# Altium PCB ESC_BOARD.PcbDoc (part 1 of 3)
Units mm, origin at the board's own origin, x right, y up, seen from the top; angles counter-clockwise.
Board outline 80 x 50 mm, 2 copper layers (Top Layer, Bottom Layer); 102 components, 86 nets, 400 pads, 339 vias.
Unrouted connection lines stored in the file: 55.
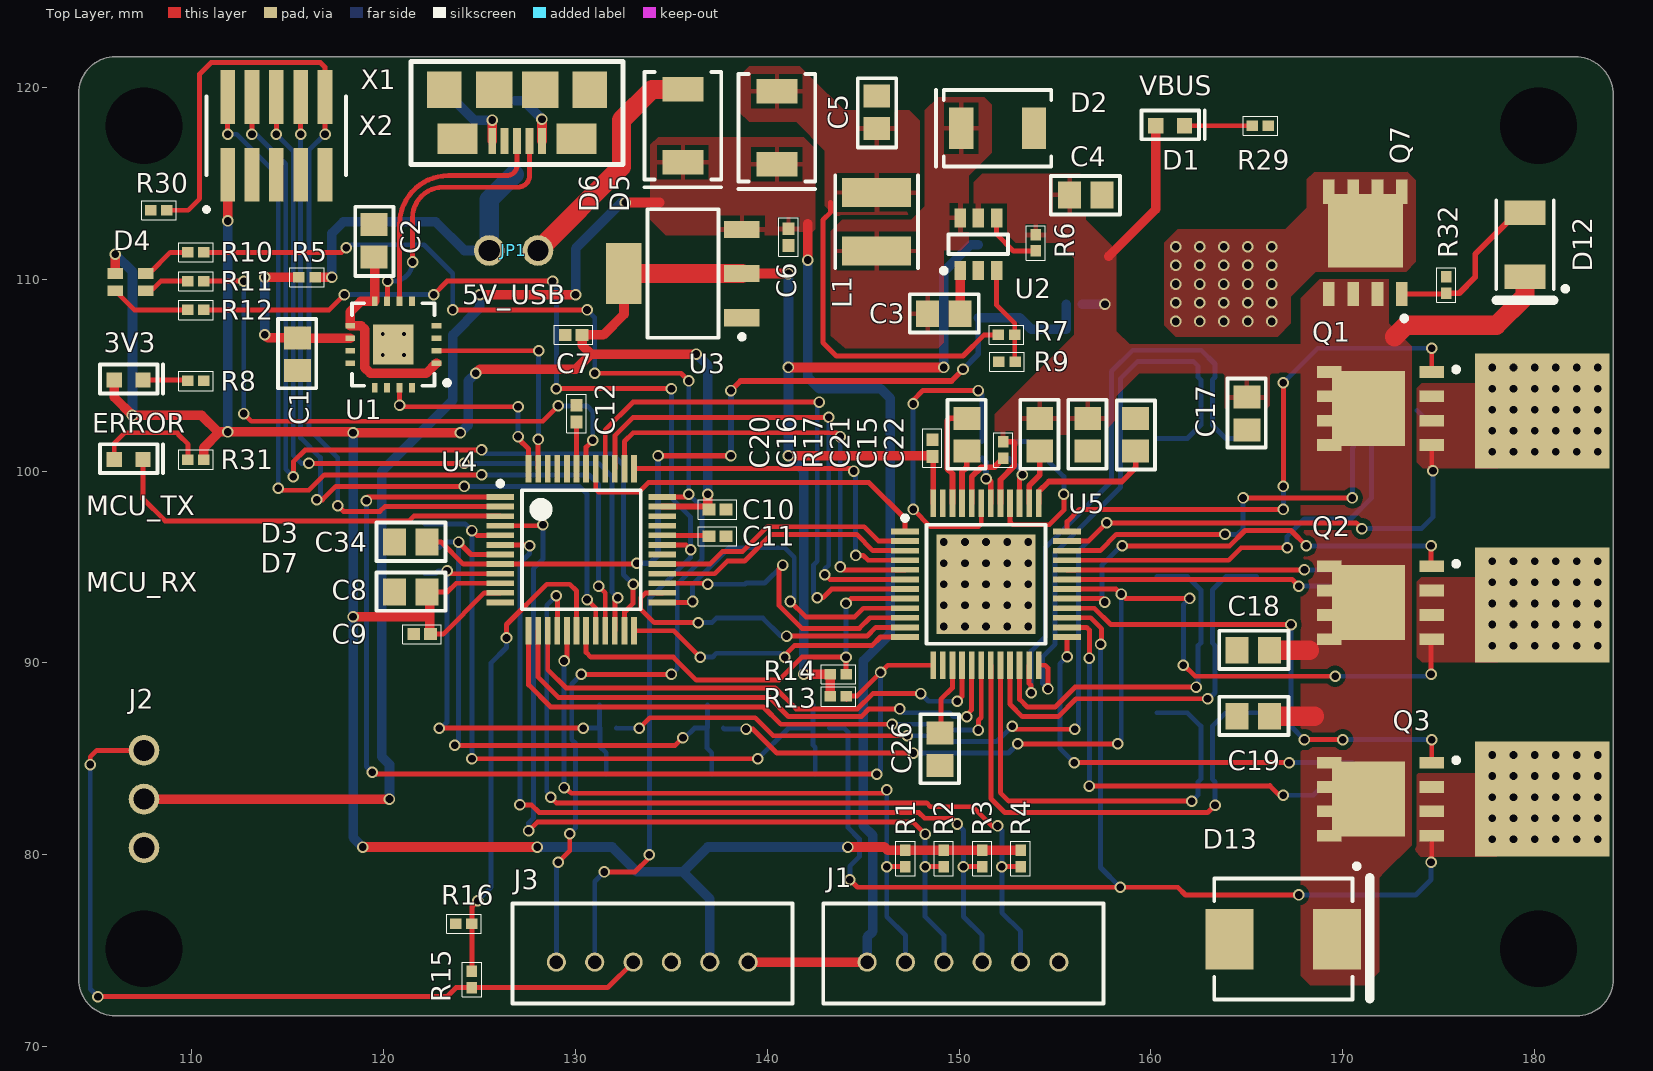
[diagram p0: Top Layer view]
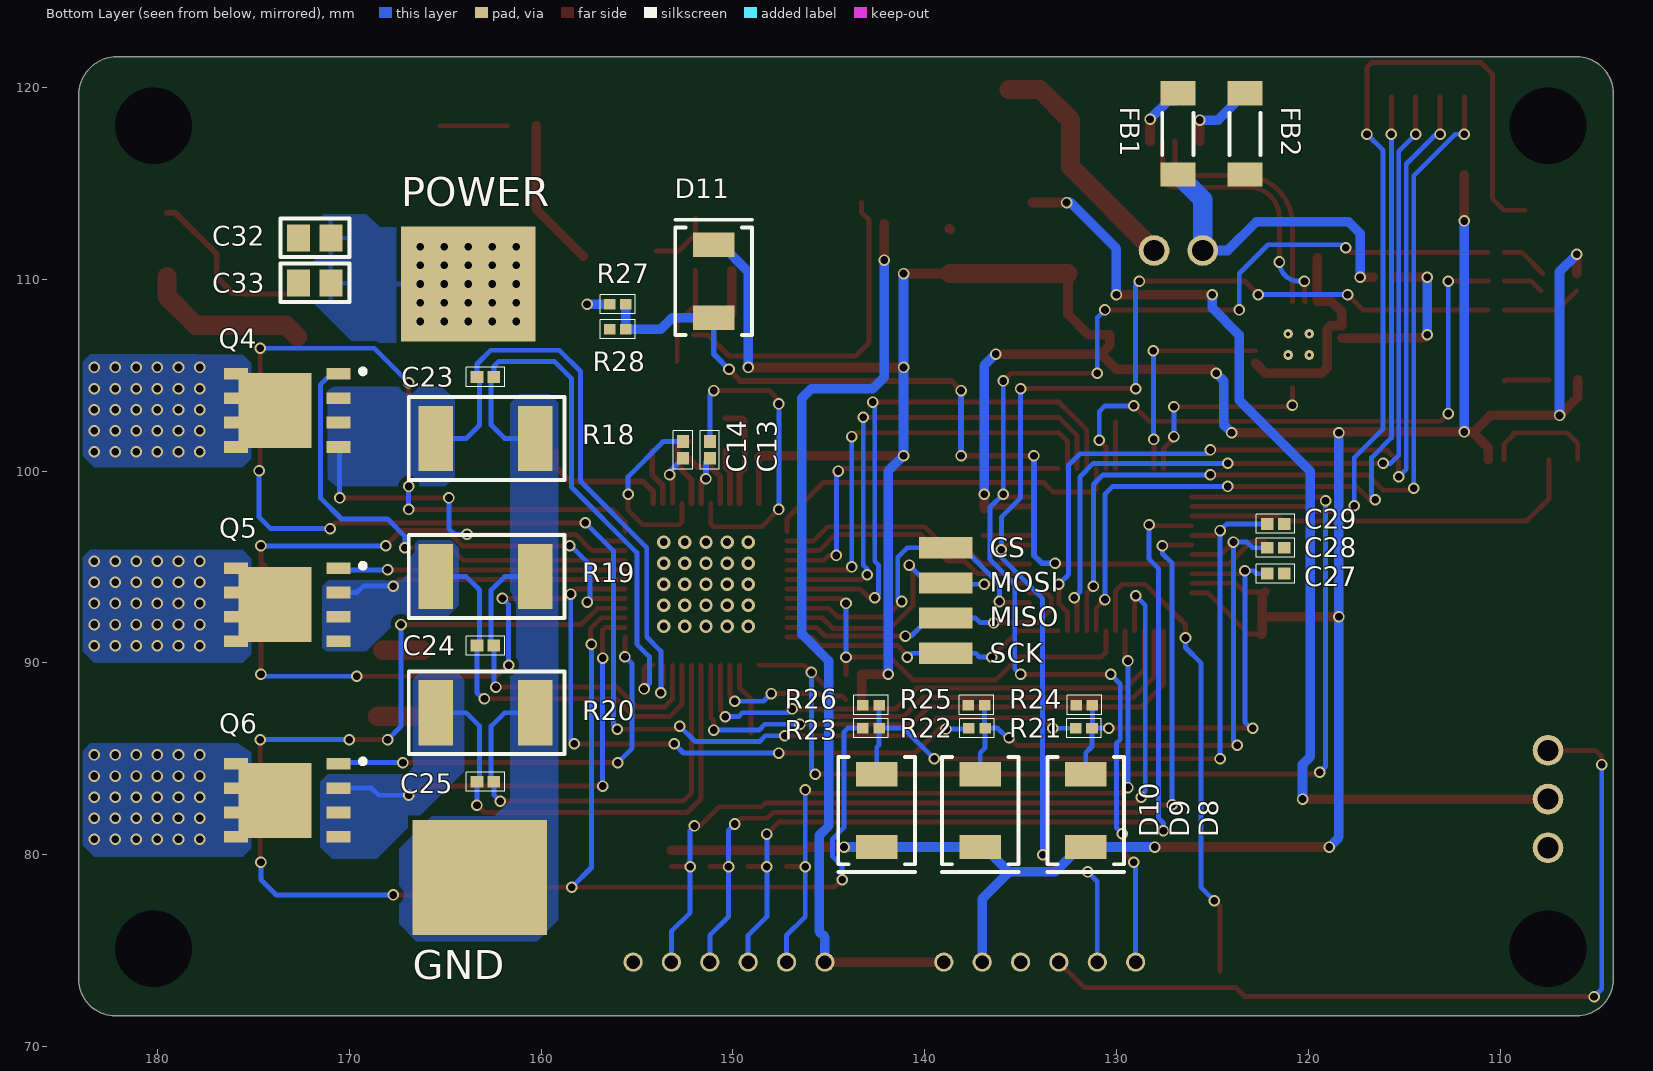
[diagram p1: Bottom Layer view, seen from below]
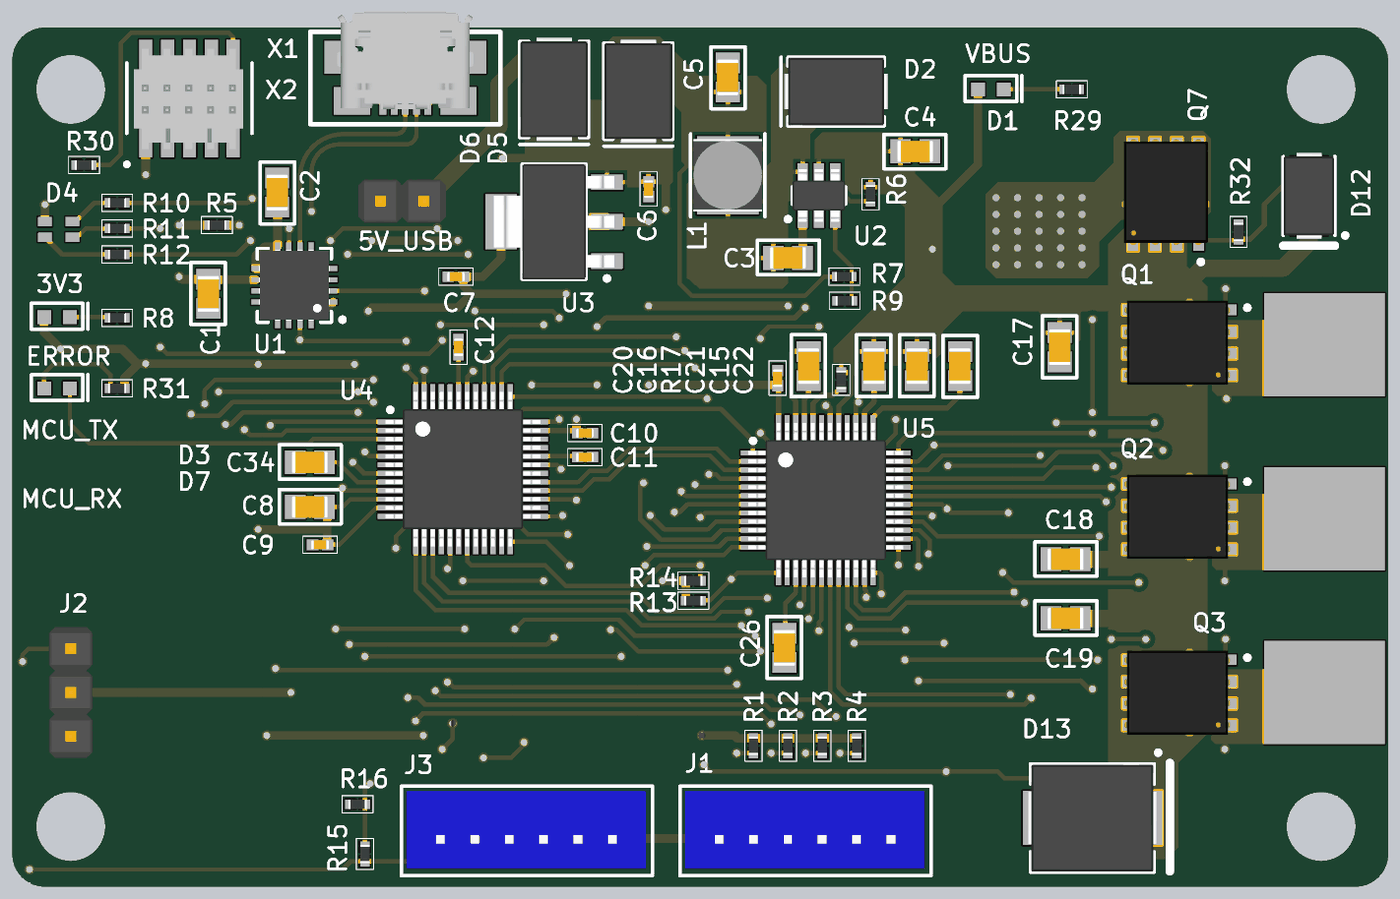
[diagram p3: 3D render of the assembled board from above, using the file's embedded part models]
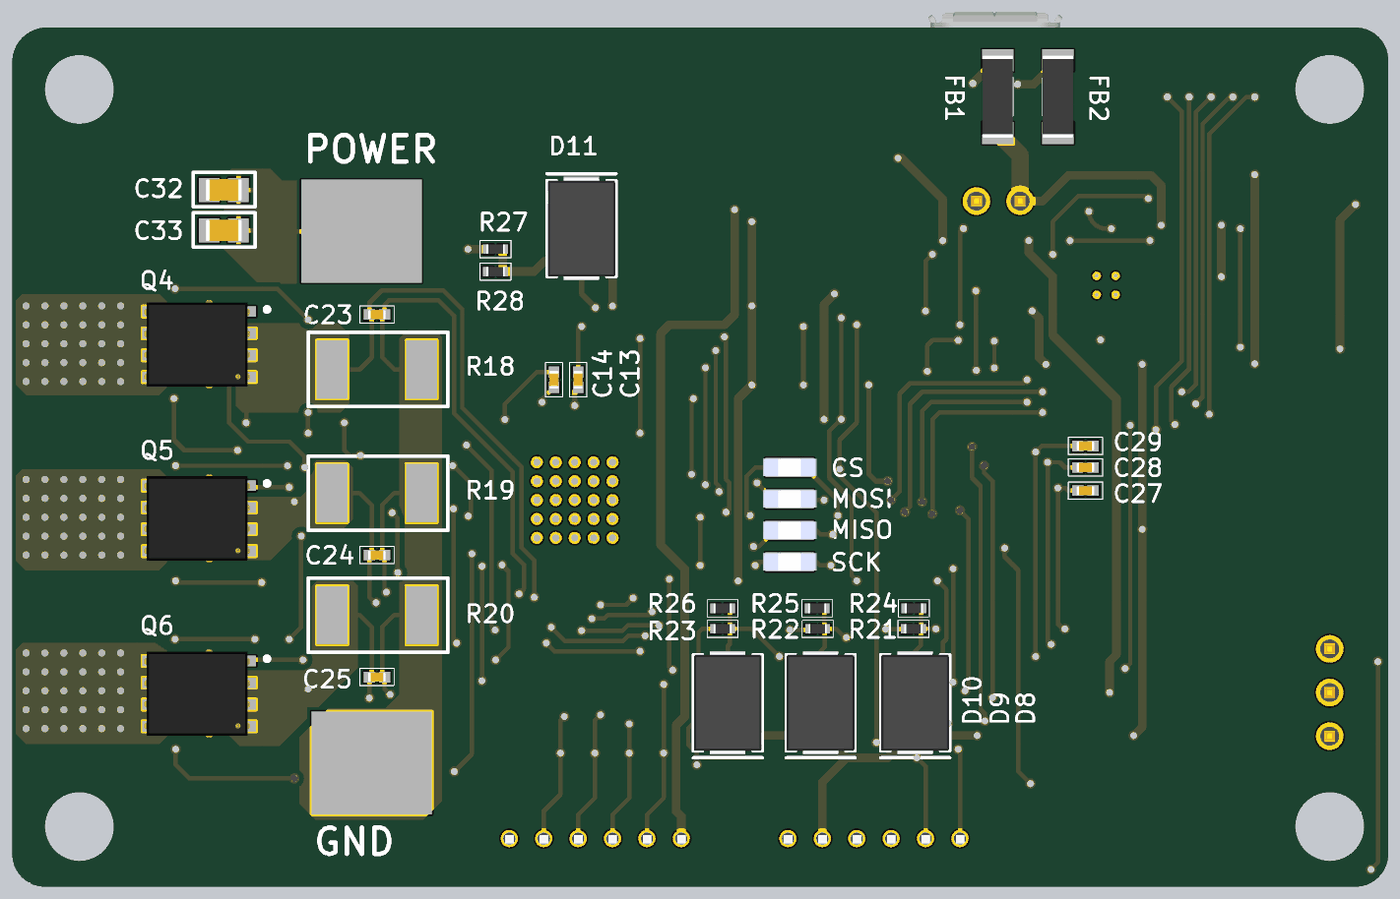
[diagram p4: 3D render of the assembled board from below, using the file's embedded part models]

## Layer stack, top to bottom
Top Solder: solder mask 0.0102, Solder Resist, Dk 3.5
Top Layer: signal copper 0.0356
Dielectric 1: dielectric 0.32, FR-4, Dk 4.8
Bottom Layer: signal copper 0.0356
Bottom Solder: solder mask 0.0102, Solder Resist, Dk 3.5

## Board outline
106,121.6 ccw(c106,119.7) 104.1,119.7 104.1,73.5 ccw(c106,73.5) 106,71.6 182.2,71.6 ccw(c182.2,73.5) 184.1,73.5 184.1,119.6 ccw(c182.1,119.6) 182.1,121.6

## Design rules (kind name [scope] priority, off if disabled: settings)
Clearance [All] p1: gap=0.254 ignorepadtopadclearanceinfootprint=FALSE except(0: Arc-Hole Track-Hole SMDPad-Hole THPad-Hole Via-Hole Fill-Hole Poly-Hole Region-Hole Text-Hole; 0.1: Arc-Arc Arc-Track Arc-SMDPad Arc-Via Track-Track Track-SMDPad Track-Via SMDPad-SMDPad)
PlaneConnect [InNet('+VBUS')] p1: planeconnectstyle=Relief reliefexpansion=0.508 reliefentries=4 reliefconductorwidth=0.254 reliefairgap=0.254
PolygonConnect "VBUS CAPS" [InComponent('C17') Or InComponent('C18') Or InComponent('C19') Or InComponent('R17') Or InComponent('C21') Or InComponent('C15') Or  InComponent('R6') Or  InComponent('U2') Or InComponent('C4')] p1: connectstyle=Relief reliefconductorwidth=0.254 reliefentries=4 polygonreliefangle="90 Angle" airgapwidth=0.254
PolygonConnect PolygonConnect_1 [All vs IsNamedPolygon('POWER_GND') Or IsNamedPolygon('V_IN')] p2: connectstyle=Direct reliefconductorwidth=0.254 reliefentries=4 polygonreliefangle="90 Angle" airgapwidth=0.254
PolygonConnect "FET DIRECT CONNECT" [InNet('+VBUS') Or InNet('SH_A') Or InNet('SH_B') Or InNet('SH_C') Or InNet('SL_C') Or InNet('SL_A') Or InNet('SL_B')] p3: connectstyle=Direct reliefconductorwidth=0.254 reliefentries=4 polygonreliefangle="90 Angle" airgapwidth=0.254
PolygonConnect [All] p4: connectstyle=Relief reliefconductorwidth=0.254 reliefentries=4 polygonreliefangle="90 Angle" airgapwidth=0.254
RoutingVias [All] p1: holewidth=0.711 width=1.27 viastyle="Through Hole" minholewidth=0.4 minwidth=0.5 maxholewidth=0.711 maxwidth=2
SolderMaskExpansion [All] p1: expansion=0.102
Width [All] p1: maxlimit=2 minlimit=0.254 preferedwidth=0.254
29 further rules are at their usual default settings.

## Classes and differential pairs
net class UART: UART_MCU_RX UART_MCU_TX
net class SPI: SPI_CS_N SPI_MISO SPI_MOSI SPI_SCK
net class PWM_GATE_DRIVES: A_HS A_LS B_HS B_LS C_HS
net class JTAG: nRESET TCK TDI TDO TMS
component class "C2000 Piccolo": C8 C9 C10 C11 C12 CS D7 MISO MOSI R13 R14 R15 R16 R30 R31 SCK U4 X2
component class DRV8305: C13 C14 C15 C16 C17 C18 C19 C20 C21 C22 C23 C24 C25 C26 C27 C28 C29 C32 C33 C34 D8 D9 D10 D11 D12 D13 Q1 Q2 Q3 Q4 Q5 Q6 Q7 R17 R18 R19 R20 R21 R22 R23 R24 R25 R26 R27 R28 R32 U5
component class POWER: C3 C4 C5 C6 C7 D1 D2 D3 D4 D5 D6 JP1 L1 R6 R7 R8 R9 R10 R11 R12 R29 U2 U3
component class TOP: J1 J2 J3 R1 R2 R3 R4
component class USB: C1 C2 FB1 FB2 R5 U1 X1

## Components (designator, comment, footprint, x,y, rotation, side; value= is the part's Value field where it differs from the comment)
C1 "10uF" C0805 115.5,106.1 r90 top
C2 "10uF" C0805 119.5,112 r270 top
C3 "100nF" C0805 149.2,108.2 r0 top
C4 "4u7" C0805 156.6,114.4 r180 top
C5 "10uF" C0805 145.7,118.7 r270 top
C6 "100nF" C0402 141.1,112.2 r90 top
C7 "100nF" C0402 129.9,107.1 r0 top
C8 "10uF" C0805 121.4,93.7 r0 top
C9 "2u2" C0402 122,91.5 r0 top
C10 "100nF" C0402 137.4,98 r180 top
C11 "2u2" C0402 137.4,96.6 r0 top
C12 "2u2" C0402 130.05,103 r90 top
C13 "47nF" C0402 151.2,101.1 r270 bottom
C14 "47nF" C0402 152.6,101.1 r270 bottom
C15 "4u7" C0805 156.7,101.9 r90 top
C16 "1uF" C0805 150.4,101.9 r90 top
C17 "1uF" C0805 165,103 r90 top
C18 "1uF" C0805 165.34,90.66 r0 top
C19 "1uF" C0805 165.34,87.22 r0 top
C20 "100nF" C0402 148.6,101.2 r270 top
C21 "2u2" C0805 154.2,101.9 r90 top
C22 "1uF" C0805 159.2,101.9 r270 top
C23 "1nF" C0402 162.9,104.9 r0 bottom
C24 "1nF" C0402 162.9,90.9 r0 bottom
C25 "1nF" C0402 162.9,83.8 r0 bottom
C26 "1uF" C0805 149,85.5 r90 top
C27 "100nF" C0402 121.7,94.65 r0 bottom
C28 "100nF" C0402 121.7,96 r0 bottom
C29 "100nF" C0402 121.7,97.25 r0 bottom
C32 "1uF" C0805 171.8,112.15 r180 bottom
C33 "100nF" C0805 171.8,109.8 r180 bottom
C34 "100nF" C0805 121.4,96.3 r0 top
CS "5015" TP_HOOK 138.9,96 r180 bottom (schematic designator TP1)
D1 "Green" LED_0603 161,118 r0 top
D2 "SS110-TP" DO-214AA_Diode 152,117.873 r180 top
D3 "Green" LED_0603 106.7,104.75 r0 top
D4 "EAST1616RGBB4" LED_TRICOLOR 107.778,109.538 r0 top
D5 "SS110-TP" DO-214AA_Diode 140.5,117.9 r270 top
D6 "SS110-TP" DO-214AA_Diode 135.6,118 r270 top
D7 "Red" LED_0603 106.7,100.6 r0 top
D8 "SS110-TP" DO-214AA_Diode 131.6,82.3 r270 bottom
D9 "SS110-TP" DO-214AA_Diode 137.1,82.3 r270 bottom
D10 "SS110-TP" DO-214AA_Diode 142.5,82.3 r270 bottom
D11 "SS110-TP" DO-214AA_Diode 151,109.9 r90 bottom
D12 "10V" DO-214AC 179.5,111.8 r270 top
D13 "51V" DO-214AB 166.9,75.6 r0 top
FB1 "23R @ 100 MHz" FB_1806 126.8,117.58 r270 bottom
FB2 "23R @ 100 MHz" FB_1806 123.3,117.58 r270 bottom
J1 "B6B-PH-K-S(LF)(SN)" JST-PH-6 145.2,74.4 r0 top
J2 "732-5316-ND" 3PIN_HEADER 107.5,82.9 r270 top
J3 "B6B-PH-K-S(LF)(SN)" JST-PH-6 129,74.4 r0 top
JP1 "952-2262-ND" 2PIN_HEADER 125.5,111.5 r0 top
L1 "22uH" INDUCTOR 145.7,113 r90 top
MISO "5015" TP_HOOK 138.9,90.5 r180 bottom (schematic designator TP2)
MOSI "5015" TP_HOOK 138.9,94.167 r180 bottom (schematic designator TP3)
Q1 "SIR186DP-T1-RE3" "SO-8 PowerPAK" 171.719,103.392 r180 top
Q2 "SIR186DP-T1-RE3" "SO-8 PowerPAK" 171.719,93.262 r180 top
Q3 "SIR186DP-T1-RE3" "SO-8 PowerPAK" 171.719,83.022 r180 top
Q4 "SIR186DP-T1-RE3" "SO-8 PowerPAK" 173.481,103.292 r0 bottom
Q5 "SIR186DP-T1-RE3" "SO-8 PowerPAK" 173.481,93.162 r0 bottom
Q6 "SIR186DP-T1-RE3" "SO-8 PowerPAK" 173.481,82.962 r0 bottom
Q7 "FDWS9509L-F085" "SO-8 PowerPAK" 171.3,112.15 r90 top
R1 "10k" R0402 147.2,79.8 r90 top
R2 "10k" R0402 149.2,79.8 r90 top
R3 "10k" R0402 151.2,79.8 r90 top
R4 "10k" R0402 153.2,79.8 r90 top
R5 "0R" R0402 116,110.1 r180 top
R6 "10k" R0402 154,111.9 r90 top
R7 "54k9" R0402 152.475,107.1 r180 top
R8 "100R" R0402 110.2,104.7 r0 top
R9 "10k" R0402 152.5,105.7 r0 top
R10 "100R" R0402 110.2,111.4 r0 top
R11 "100R" R0402 110.2,109.9 r0 top
R12 "100R" R0402 110.2,108.4 r0 top
R13 "10k" R0402 143.7,88.25 r180 top
R14 "10k" R0402 143.7,89.4 r180 top
R15 "0R" R0402 124.6,73.5 r270 top
R16 "10k" R0402 124.175,76.4 r0 top
R17 "100R" R0402 152.3,101.1 r90 top
R18 "0R002" R2512 162.96,101.7 r0 bottom
R19 "0R002" R2512 162.96,94.5 r0 bottom
R20 "0R002" R2512 162.96,87.4 r0 bottom
R21 "34K8" R0402 131.7,86.6 r0 bottom
R22 "34K8" R0402 137.275,86.6 r0 bottom
R23 "34K8" R0402 142.8,86.6 r0 bottom
R24 "4K99" R0402 131.675,87.8 r180 bottom
R25 "4K99" R0402 137.3,87.8 r180 bottom
R26 "4K99" R0402 142.8,87.8 r180 bottom
R27 "34K8" R0402 156,108.7 r0 bottom
R28 "4K99" R0402 156,107.4 r180 bottom
R29 "2k2" R0402 165.7,118 r0 top
R30 "2k2" R0402 108.275,113.6 r0 top
R31 "2k2" R0402 110.2,100.6 r0 top
R32 "54k9" R0402 175.4,109.7 r270 top
SCK "5015" TP_HOOK 138.9,92.333 r180 bottom (schematic designator TP4)
U1 "FT230XQ-R" QFN_EP-16 120.5,106.6 r180 top
U2 "LMR16006XDDCR" SOT23-6_Lead 151,111.825 r90 top
U3 "AZ1117EH-3.3TRG1" SOT223 135.6,110.3 r180 top
U4 "TMS320F28026FPTT" PQFP-48 130.3,95.9 r0 top
U5 "DRV83053PHPR" PQFP_EP-48 151.4,94.1 r0 top
X1 "10118192-0001LF" USB_MICRO 126.95,117.2 r180 top
X2 "FTSH-105-01-F-DV-K" JTAG_50mil_10pin 111.86,115.44 r180 top

## Footprints (in the part's own frame and the unit in brackets; to place one, negate y for a bottom-side part, rotate by r counter-clockwise, add the part's x,y. Pads: shape width x height; smd on the part's side, far side on the other; paste and mask are expansions set on the pad)
2PIN_HEADER [mm]
  round 1.6 hole 1.1: 1(0,0) 2(2.54,0)
  body extent -1.27,-1.27 3.81,1.27, height 9.5
3PIN_HEADER [mm]
  round 1.6 hole 1.1: 1(-2.54,0) 2(0,0) 3(2.54,0)
  body extent -3.81,-1.27 3.81,1.27, height 9.5
C0402 [mm] "Chip Capacitor, 2-Leads, Body 1.00x0.50mm, IPC Medium Density"
  rect 0.66x0.62 smd: 1(-0.44,0) 2(0.44,0)
  silkscreen extent -1,-0.5 1,0.5, body extent -0.53,-0.28 0.53,0.28, height 0.55
C0805 [mm] "Chip Capacitor, 2-Leads, Body 2.00x1.25mm, IPC Medium Density"
  rect 1.2x1.4 smd: 1(-0.85,0) 2(0.85,0)
  silkscreen extent -1.78,-0.98 1.82,1.02, body extent -1.05,-0.63 1.05,0.63, height 1.35
DO-214AA_Diode [mm] "Molded Diode, 2-Leads, Body 5.33x3.62mm, IPC Medium Density"
  rect 1.27x2.15 smd: 1(-1.9,0) 2(1.9,0)
  silkscreen extent -2.8,-2 3.2,2, body extent -3.02,-1.97 3.02,1.97, height 2.62
DO-214AB [mm] "Molded Diode, 2-Leads, Body 6.85x5.90mm, IPC Medium Density"
  rect 2.5x3.15 smd: 1(2.8,0) 2(-2.8,0)
  silkscreen extent -3.6,-3.15 4.5,3.92, body extent -3.77,-3.11 3.77,3.11, height 2.62
DO-214AC [mm] "Molded Diode, 2-Leads, Body 4.30x2.60mm, IPC Medium Density"
  rect 1.27x2.15 smd: 1(1.665,0) 2(-1.665,0)
  silkscreen extent -2.3,-1.5 2.9,2.23, body extent -2.52,-1.46 2.52,1.46, height 2.4
FB_1806 [mm] "Chip Inductor, 2-Leads, Body 4.50x1.60mm, IPC Medium Density"
  rect 1.27x1.82 smd: 1(-2.12,0) 2(2.12,0)
  silkscreen extent -1.1,-0.81 1.1,0.81, body extent -2.4,-0.9 2.4,0.9, height 1.3
INDUCTOR [mm] "Precision Wire Wound Inductor, 2-Leads, Body 4.00x4.00mm, IPC Medium Density"
  rect 1.5x3.6 smd: 1(-1.524,0) 2(1.524,0)
  silkscreen extent -2.41,-2.16 2.41,2.16, body extent -2.1,-2 2.1,2, height 2.6
JST-PH-6 [mm]
  round 1 hole 0.7: 1(0,0) 2(2,0) 3(4,0) 4(6,0) 5(8,0) 6(10,0)
  silkscreen extent -2.29,-2.16 12.32,3.05, body extent -1.96,-1.74 11.94,2.76, height 6
JTAG_50mil_10pin [mil]
  rect 30x110 smd: 1(0,0) 2(0,-159.84) 3(-50,0) 4(-50,-159.84) 5(-100,0) 6(-100,-159.84) 7(-150,0) 8(-150,-159.84) 9(-200,0) 10(-200,-159.84)
  silkscreen extent -243,-161 47,75, body extent -223,-194 27,36, height 241
LED_0603 [mm]
  rect 0.8x0.8 smd: 1(-0.75,0) 2(0.75,0)
  silkscreen extent -1.5,-0.7 1.8,0.8
LED_TRICOLOR [mm]
  rect 0.8x0.55 smd: 1(-0.178,0.762) 2(-0.178,-0.138) 3(-1.778,-0.138) 4(-1.778,0.762)
PQFP-48 [mm] "TSQFP, 48-Leads, Body 7.00x7.00mm, Pitch 0.50mm, IPC Medium Density"
  rect 1.45x0.3 smd: 1(-4.225,2.75) 2(-4.225,2.25) 3(-4.225,1.75) 4(-4.225,1.25) 5(-4.225,0.75) 6(-4.225,0.25) 7(-4.225,-0.25) 8(-4.225,-0.75) 9(-4.225,-1.25) 10(-4.225,-1.75) 11(-4.225,-2.25) 12(-4.225,-2.75) 25(4.225,-2.75) 26(4.225,-2.25) 27(4.225,-1.75) 28(4.225,-1.25) 29(4.225,-0.75) 30(4.225,-0.25) 31(4.225,0.25) 32(4.225,0.75) 33(4.225,1.25) 34(4.225,1.75) 35(4.225,2.25) 36(4.225,2.75)
  rect 0.3x1.45 smd: 13(-2.75,-4.225) 14(-2.25,-4.225) 15(-1.75,-4.225) 16(-1.25,-4.225) 17(-0.75,-4.225) 18(-0.25,-4.225) 19(0.25,-4.225) 20(0.75,-4.225) 21(1.25,-4.225) 22(1.75,-4.225) 23(2.25,-4.225) 24(2.75,-4.225) 37(2.75,4.225) 38(2.25,4.225) 39(1.75,4.225) 40(1.25,4.225) 41(0.75,4.225) 42(0.25,4.225) 43(-0.25,4.225) 44(-0.75,4.225) 45(-1.25,4.225) 46(-1.75,4.225) 47(-2.25,4.225) 48(-2.75,4.225)
  silkscreen extent -4.35,-3.1 3.1,3.57, body extent -4.5,-4.5 4.5,4.5, height 1.6
PQFP_EP-48 [mm] "TSQFP, 48-Leads, Body 7.00x7.00mm, Pitch 0.50mm, Thermal Pad 5.17x5.17mm, IPC Medium Density"
  rect 1.45x0.3 smd: 1(-4.225,2.75) 2(-4.225,2.25) 3(-4.225,1.75) 4(-4.225,1.25) 5(-4.225,0.75) 6(-4.225,0.25) 7(-4.225,-0.25) 8(-4.225,-0.75) 9(-4.225,-1.25) 10(-4.225,-1.75) 11(-4.225,-2.25) 12(-4.225,-2.75) 25(4.225,-2.75) 26(4.225,-2.25) 27(4.225,-1.75) 28(4.225,-1.25) 29(4.225,-0.75) 30(4.225,-0.25) 31(4.225,0.25) 32(4.225,0.75) 33(4.225,1.25) 34(4.225,1.75) 35(4.225,2.25) 36(4.225,2.75)
  rect 0.3x1.45 smd: 13(-2.75,-4.225) 14(-2.25,-4.225) 15(-1.75,-4.225) 16(-1.25,-4.225) 17(-0.75,-4.225) 18(-0.25,-4.225) 19(0.25,-4.225) 20(0.75,-4.225) 21(1.25,-4.225) 22(1.75,-4.225) 23(2.25,-4.225) 24(2.75,-4.225) 37(2.75,4.225) 38(2.25,4.225) 39(1.75,4.225) 40(1.25,4.225) 41(0.75,4.225) 42(0.25,4.225) 43(-0.25,4.225) 44(-0.75,4.225) 45(-1.25,4.225) 46(-1.75,4.225) 47(-2.25,4.225) 48(-2.75,4.225)
  rect 5.17x5.17 smd: 49(0,0)
  silkscreen extent -4.35,-3.1 3.1,3.57, body extent -4.5,-4.5 4.5,4.5, height 1.2
QFN_EP-16 [mm] "QFN, 16-Leads, Body 4.00x4.00mm, Pitch 0.65mm, Thermal Pad 2.10x2.10mm, IPC Medium Density"
  rect 0.5x0.3 smd: 1(-2.25,0.975) 2(-2.25,0.325) 3(-2.25,-0.325) 4(-2.25,-0.975) 9(2.25,-0.975) 10(2.25,-0.325) 11(2.25,0.325) 12(2.25,0.975)
  rect 0.3x0.5 smd: 5(-0.975,-2.25) 6(-0.325,-2.25) 7(0.325,-2.25) 8(0.975,-2.25) 13(0.975,2.25) 14(0.325,2.25) 15(-0.325,2.25) 16(-0.975,2.25)
  rect 2.1x2.1 smd: 17(0,0)
  silkscreen extent -2.93,-2.15 2.15,2.15, body extent -2.05,-2.05 2.05,2.05, height 0.8
R0402 [mm] "Chip Resistor, 2-Leads, Body 1.00x0.50mm, IPC Medium Density"
  rect 0.6x0.55 smd: 1(-0.425,0) 2(0.425,0)
  silkscreen extent -0.9,-0.5 0.9,0.5, body extent -0.53,-0.28 0.53,0.28, height 0.4
R2512 [mm]
  rect 1.8x3.4 smd: 1(-2.66,0) 2(2.54,0)
  silkscreen extent -4.19,-2.16 3.94,2.16
"SO-8 PowerPAK" [mil]
  rect 50x24.02 smd: 1(-115,-70) 2(95.24,80) 2(95.24,-20) 2(95.24,30) 2(95.24,-70) 3(-115,80) 3(-115,-20) 3(-115,30)
  rect 150x153.94 smd: 2(15,5)
  silkscreen extent -170,-80 -160,-70, body extent -126,-96 116,106, height 41
SOT23-6_Lead [mm] "SOT23, 6-Leads, Body 2.90x2.80mm, Pitch 0.95mm, IPC Medium Density"
  rect 1x0.6 smd: 1(-1.375,0.95) 2(-1.375,0) 3(-1.375,-0.95) 4(1.375,-0.95) 5(1.375,0) 6(1.375,0.95)
  silkscreen extent -1.5,-1.55 0.5,1.92, body extent -1.53,-1.53 1.53,1.53, height 1.1
SOT223 [mm] "SOT223, 4-Leads, Body 6.50x7.00mm (avg), Pitch 2.30mm, IPC Medium Density"
  rect 1.85x0.9 smd: 1(-3.075,2.3) 2(-3.075,0) 3(-3.075,-2.3)
  rect 1.85x3.2 smd: 2(3.075,0)
  silkscreen extent -3.2,-3.35 1.85,3.42, body extent -3.5,-3.35 3.5,3.35, height 1.63
TP_HOOK [mm]
  rect 2.8x1.1 smd: 1(0,0)
  body extent -1.56,-0.51 1.56,0.51, height 1.52
USB_MICRO [mm]
  rect 0.4x1.35 smd: 1(-1.3,0) 3(0,0) 4(0.65,0) 5(1.3,0)
  rect 0.4x1.355 smd: 2(-0.65,0)
  rect 1.8x1.9 smd: ""(-3.8,-2.675) ""(3.8,-2.675)
  rect 2.1x1.6 smd: ""(-3.1,-0.125) ""(3.1,-0.125)
  rect 1.9x1.9 smd: ""(-1.2,-2.675) ""(1.2,-2.675)
  silkscreen extent -5.53,-4.15 5.52,1.22, body extent -3.96,-5.31 3.96,0.35, height 2.74

## Part data
C1 C2 C5 C8: library part CL21A106KOQNNNE, "CAP CER 10uF 16V X5R 10% SMD 0805 85C T/R", Case/Package=0805, Case Code (Metric)=2012, Dielectric=X7R, Manufacturer=Samsung, Max Operating Temperature=85°C, Min Operating Temperature=-55°C, Package Quantity=1, Supplier Part Number 1=1276-1096-1-ND, Tolerance=10%, Voltage=16V, Capacitance=10uF, Case Code (Imperial)=0805, ComponentLink1Description=https://datasheet.ciiva.com/25798/cl21a106koqnnne-25798133.pdf, ComponentLink1URL=https://datasheet.ciiva.com/25798/cl21a106koqnnne-25798133.pdf, ComponentLink2Description=https://datasheet.ciiva.com/16740/cl05b104kq5nnnc-16740697.pdf, ComponentLink2URL=https://datasheet.ciiva.com/16740/cl05b104kq5nnnc-16740697.pdf, ComponentLink3Description=https://datasheet.ciiva.com/15216/getdatasheetpartid-358435-15216234.pdf, ComponentLink3URL=https://datasheet.ciiva.com/15216/getdatasheetpartid-358435-15216234.pdf, Depth=1.25mm, Height=1.25mm, Lead Free="Lead Free", Length=2mm, Manufacturer Part Number=CL21A106KOQNNNE, Mount="Surface Mount", Packaging="Tape and Reel", Pricing 1="1=0.21, 10=0.148, 100=0.0698, 500=0.0489, 1000=0.0405 (USD)", Radiation Hardening=No, Stock 1=20000, Supplier 1=Digi-Key, Thickness=0.055inch, Voltage Rating=16V, Voltage Rating (DC)=16V, Width=0.049inch
C3 C33: library part CL21B104KCFWPNE, "CAP CER 0.10µF 100V Ceramic Capacitor X7R 0805 (2012 Metric) 0.079\" L x 0.049\" W (2.00mm x 1.25mm)", Case/Package=0805, Case Code (Metric)=2012, Manufacturer=Samsung, Max Operating Temperature=125°C, Min Operating Temperature=-55°C, Supplier Part Number 1=1276-6733-1-ND, Tolerance=10%, Voltage Rating=100V, Capacitance=100nF, Case Code (Imperial)=0805, Length=0.079inch, Manufacturer Part Number=CL21B104KCFWPNE, Mount="Surface Mount", Packaging="Tape and Reel", Pricing 1="1=0.17, 10=0.118, 100=0.0556, 500=0.039, 1000=0.0323 (USD)", Stock 1=6000, Supplier 1=Digi-Key, Thickness=0.053inch, Width=0.049inch
C4 C15: library part CL21A475KBQNNNE, "CAP CER 4.7uF 50V X5R 10% SMD 0805 85C Embossed T/R", Capacitance=4.7uF, Case/Package=0805, Case Code (Metric)=2012, Dielectric=X5R, Manufacturer=Samsung, Max Operating Temperature=85°C, Min Operating Temperature=-55°C, Package Quantity=1, Supplier Part Number 1=1276-1248-1-ND, Tolerance=10%, Voltage Rating=50V, Case Code (Imperial)=0805, ComponentLink1Description=https://datasheet.ciiva.com/25797/cl21a475kbqnnne-25797730.pdf, ComponentLink1URL=https://datasheet.ciiva.com/25797/cl21a475kbqnnne-25797730.pdf, ComponentLink2Description=https://datasheet.ciiva.com/26838/getdatasheetpartid-470982-26838620.pdf, ComponentLink2URL=https://datasheet.ciiva.com/26838/getdatasheetpartid-470982-26838620.pdf, ComponentLink3Description=https://datasheet.ciiva.com/16428/cl21a475kbqnnne-16428877.pdf, ComponentLink3URL=https://datasheet.ciiva.com/16428/cl21a475kbqnnne-16428877.pdf, Depth=1.25mm, Length=2mm, Manufacturer Part Number=CL21A475KBQNNNE, Mount="Surface Mount", Packaging="Tape and Reel", Pricing 1="1=0.44, 10=0.309, 100=0.1854, 500=0.1391, 1000=0.1174 (USD)", Radiation Hardening=No, Stock 1=20000, Supplier 1=Digi-Key, Thickness=0.055inch, Width=0.049inch
C6 C7 C10 C20 C27 C28 C29: library part CL05B104KQ5NNNC, "CAP CER 0.1uF 6.3V X7R 10% SMD 0402 125C Paper T/R", Case/Package=0402, Case Code (Metric)=1005, Dielectric=X7R, Manufacturer=Samsung, Max Operating Temperature=125°C, Min Operating Temperature=-55°C, Supplier Part Number 1=1276-1511-1-ND, Tolerance=10%, Voltage Rating=6.3V, Capacitance=100nF, Case Code (Imperial)=0402, Depth=0.5mm, Height=0.5mm, Lead Free="Lead Free", Length=1mm, Manufacturer Part Number=CL05B104KQ5NNNC, Mount="Surface Mount", Packaging="Tape and Reel", Pricing 1="1=0.1, 10=0.03, 100=0.0134, 500=0.0096, 1000=0.0075, 2500=0.0068, 5000=0.0063 (USD)", Radiation Hardening=No, Stock 1=100000, Supplier 1=Digi-Key, Thickness=0.022inch, Voltage Rating (DC)=6.3V, Width=0.02inch
C9 C11 C12: library part GRM155R61A225ME95D, "CAP CER 2.2uF 10V X5R 20% SMD 0402 85C Paper T/R", Capacitance=2.2uF, Case/Package=0402, Case Code (Metric)=1005, Dielectric=X5R, Manufacturer=Murata, Max Operating Temperature=85°C, Min Operating Temperature=-55°C, Supplier Part Number 1=490-10452-1-ND, Tolerance=20%, Voltage Rating=10V, Case Code (Imperial)=0402, Depth=0.5mm, Length=0.039inch, Manufacturer Part Number=GRM155R61A225ME95D, Mount="Surface Mount", Packaging="Tape and Reel", Pricing 1="1=0.13, 10=0.096, 100=0.045, 500=0.0316, 1000=0.0261, 2500=0.0243, 5000=0.0223 (USD)", Stock 1=100000, Supplier 1=Digi-Key, Thickness=0.022inch, Voltage Rating (DC)=10V, Width=0.02inch
C13 C14: library part CGA2B3X7R1H473K050BB, "CAP CER 0.047uF 50 V,  10%, X7R, CGA Series", Case/Package=0402, Case Code (Metric)=1005, Dielectric=X7R, Manufacturer=TDK, Max Operating Temperature=125°C, Min Operating Temperature=-55°C, Package Quantity=1, Ratings=AEC-Q200, Supplier Part Number 1=445-6897-1-ND, Tolerance=10%, Voltage Rating=50V, Capacitance=47nF, Case Code (Imperial)=0402, Composition=Ceramic, Depth=0.5mm, Height=0.5mm, Lead Free="Lead Free", Length=1mm, Manufacturer Part Number=CGA2B3X7R1H473K050BB, Mount="Surface Mount", Packaging="Tape and Reel", Pricing 1="1=0.13, 10=0.099, 100=0.0439, 500=0.0314, 1000=0.0247, 2500=0.0224, 5000=0.0206 (USD)", Radiation Hardening=No, REACH SVHC="No SVHC", Stock 1=76108, Supplier 1=Digi-Key, Termination=SMD/SMT, Thickness=0.022inch, Voltage Rating (DC)=50V, Weight=2.3E-05oz, Width=0.02inch
C16 C17 C18 C19 C22 C26 C32: library part C2012X7S2A105M125AE, "CAP CER 1UF 100V X7S 0805", Case/Package=0805, Case Code (Metric)=2012, Dielectric=X7S, Manufacturer=TDK, Max Operating Temperature=125°C, Min Operating Temperature=-55°C, Package Quantity=1, Supplier Part Number 1=445-6804-1-ND, Tolerance=20%, Voltage Rating=100V, Capacitance=1uF, Case Code (Imperial)=0805, ComponentLink1Description=https://datasheet.ciiva.com/24216/c2012x7s2a105m125ae-265183-24216851.pdf, ComponentLink1URL=https://datasheet.ciiva.com/24216/c2012x7s2a105m125ae-265183-24216851.pdf, ComponentLink2Description=https://datasheet.ciiva.com/6287/mlcc-commercial-soft-en-6287845.pdf, ComponentLink2URL=https://datasheet.ciiva.com/6287/mlcc-commercial-soft-en-6287845.pdf, ComponentLink3Description=https://datasheet.ciiva.com/6287/mlcc-commercial-soft-en-6287849.pdf, ComponentLink3URL=https://datasheet.ciiva.com/6287/mlcc-commercial-soft-en-6287849.pdf, ComponentLink4Description=https://datasheet.ciiva.com/6287/mlcc-commercial-soft-en-6287854.pdf, ComponentLink4URL=https://datasheet.ciiva.com/6287/mlcc-commercial-soft-en-6287854.pdf, Composition=Ceramic, Height=1.45mm, Lead Free="Lead Free", Length=2mm, Manufacturer Part Number=C2012X7S2A105M125AE, Mount="Surface Mount", Packaging="Tape and Reel", Pricing 1="1=0.5, 10=0.356, 100=0.2347, 500=0.1739, 1000=0.1478 (USD)", Stock 1=20000, Supplier 1=Digi-Key, Termination=SMD/SMT, Thickness=0.057inch, Voltage Rating (DC)=100V, Weight=0.000194oz, Width=1.2mm
C21: library part C2012X5R1H225M125AB, "CAP CER 2.2UF 50V X5R 0805", Capacitance=2.2uF, Case/Package=0805, Case Code (Metric)=2012, Dielectric=X5R, Dielectric Material=Ceramic, Manufacturer=TDK, Max Operating Temperature=85°C, Min Operating Temperature=-55°C, Package Quantity=1, Supplier Part Number 1=445-5977-1-ND, Tolerance=20%, Voltage Rating=50V, Case Code (Imperial)=0805, ComponentLink1Description=https://datasheet.ciiva.com/6287/tdkmlcccaprange-6287511.pdf, ComponentLink1URL=https://datasheet.ciiva.com/6287/tdkmlcccaprange-6287511.pdf, ComponentLink2Description=https://datasheet.ciiva.com/6287/tdkmlcccaprange-6287514.pdf, ComponentLink2URL=https://datasheet.ciiva.com/6287/tdkmlcccaprange-6287514.pdf, ComponentLink3Description=https://datasheet.ciiva.com/6287/tdkmlcccaprange-6287516.pdf, ComponentLink3URL=https://datasheet.ciiva.com/6287/tdkmlcccaprange-6287516.pdf, ComponentLink4Description=https://datasheet.ciiva.com/24221/c2012x5r1h225m125ab-265113-24221566.pdf, ComponentLink4URL=https://datasheet.ciiva.com/24221/c2012x5r1h225m125ab-265113-24221566.pdf, Composition=Ceramic, Depth=1.25mm, Height=1.25mm, Lead Free="Lead Free", Length=2mm, Manufacturer Part Number=C2012X5R1H225M125AB, Mount="Surface Mount", Packaging="Tape and Reel", Pricing 1="1=0.67, 10=0.472, 100=0.3105, 500=0.23, 1000=0.1955 (USD)", Stock 1=2000, Supplier 1=Digi-Key, Termination=SMD/SMT, Thickness=0.057inch, Voltage Rating (DC)=50V, Weight=0.000194oz, Width=0.049inch
C23 C24 C25: library part GCM155R72A102KA37D, "CAP CER 1000PF 100V X7R 0402", Case/Package=0402, Case Code (Metric)=1005, Dielectric=X7R, Manufacturer=Murata, Max Operating Temperature=125°C, Min Operating Temperature=-55°C, Package Quantity=1, Ratings=AEC-Q200, Supplier Part Number 1=490-4764-1-ND, Tolerance=10%, Voltage=100V, Capacitance=1nF, Case Code (Imperial)=0402, Depth=0.5mm, Height=0.5mm, Length=1mm, Manufacturer Part Number=GCM155R72A102KA37D, Mount="Surface Mount", Packaging="Tape and Reel", Pricing 1="1=0.1, 10=0.058, 100=0.026, 500=0.0186, 1000=0.0146, 2500=0.0133, 5000=0.0122 (USD)", Radiation Hardening=No, REACH SVHC="No SVHC", Stock 1=100000, Supplier 1=Digi-Key, Termination=SMD/SMT, Thickness=0.022inch, Voltage Rating=100V, Voltage Rating (DC)=100V, Width=0.02inch
C34: library part C0805C104K9RACTU, "CAP CER 0.10uF 6.3V X7R MLCC - SMD/SMT 6.3volts 0.1uF X7R 10%", Case/Package=0805, Case Code (Metric)=2012, Dielectric=X7R, Dielectric Material=Ceramic, Manufacturer=KEMET, Max Operating Temperature=125°C, Min Operating Temperature=-55°C, Package Quantity=1, Supplier Part Number 1=399-9155-1-ND, Tolerance=10%, Voltage Rating=6.3V, Capacitance=100nF, Case Code (Imperial)=0805, Depth=1.25mm, Height=0.9mm, Length=2mm, Manufacturer Part Number=C0805C104K9RACTU, Mount="Surface Mount", Packaging="Tape and Reel", Pricing 1="1=0.22, 10=0.151, 100=0.0765, 500=0.0523, 1000=0.0463 (USD)", Stock 1=40000, Supplier 1=Digi-Key, Termination=SMD/SMT, Thickness=0.035inch, Voltage Rating (DC)=6.3V, Width=0.049inch
CS MISO MOSI SCK: "TEST POINT, PCB, SMT", Colour=White, Manufacturer="Keystone Electronics", Package Quantity=1, Supplier Part Number 1=36-5015CT-ND, ComponentLink1Description=https://datasheet.ciiva.com/2917/5015-2917616.pdf, ComponentLink1URL=https://datasheet.ciiva.com/2917/5015-2917616.pdf, ComponentLink2Description=https://datasheet.ciiva.com/2917/5015-2917617.pdf, ComponentLink2URL=https://datasheet.ciiva.com/2917/5015-2917617.pdf, ComponentLink3Description=https://datasheet.ciiva.com/1123/5015-1123862.pdf, ComponentLink3URL=https://datasheet.ciiva.com/1123/5015-1123862.pdf, ComponentLink4Description=https://datasheet.ciiva.com/16883/70182998-16883734.pdf, ComponentLink4URL=https://datasheet.ciiva.com/16883/70182998-16883734.pdf, Contact Material=Bronze, Contact Plating=Tin,Silver,Lead, Depth=1.01mm, Height=0.06inch, Lead Free="Lead Free", Length=2.66mm, Manufacturer Part Number=5015, Material=Bronze,Silver, Mount="Surface Mount", Number of Ports=1, Orientation=Straight, Packaging="Tape and Reel", Pricing 1="1=0.44, 10=0.421, 25=0.3604, 50=0.3064, 100=0.2944, 250=0.2644, 500=0.2524 (USD)", REACH SVHC="No SVHC", Stock 1=1937775, Supplier 1=Digi-Key, Termination=Solder, Thickness=0.01inch
D1 D3: library part LTST-C191KGKT, "LED GREEN CLEAR 0603 SMD", Case/Package=0603, Case Code (Metric)=1608, Forward Current=30mA, Forward Voltage=2V, Lens Colour=Clear,Colorless, Manufacturer="Vishay Lite-On", Max Operating Temperature=85°C, Min Operating Temperature=-55°C, Package Quantity=1, Power Dissipation=75mW, Supplier Part Number 1=160-1446-6-ND, Test Current=20mA, Case Code (Imperial)=0603, Colour=Green, ComponentLink1Description=https://datasheet.ciiva.com/12400/100-ltst-c191kgkt-53586-12400818.pdf, ComponentLink1URL=https://datasheet.ciiva.com/12400/100-ltst-c191kgkt-53586-12400818.pdf, ComponentLink2Description=https://datasheet.ciiva.com/2109/s-110-ltst-c191kgkt-2109973.pdf, ComponentLink2URL=https://datasheet.ciiva.com/2109/s-110-ltst-c191kgkt-2109973.pdf, ComponentLink3Description=https://datasheet.ciiva.com/2109/s-110-ltst-c191kgkt-2109974.pdf, ComponentLink3URL=https://datasheet.ciiva.com/2109/s-110-ltst-c191kgkt-2109974.pdf, ComponentLink4Description=https://datasheet.ciiva.com/2109/s-110-ltst-c191kgkt-2109975.pdf, ComponentLink4URL=https://datasheet.ciiva.com/2109/s-110-ltst-c191kgkt-2109975.pdf, ComponentLink5Description=https://datasheet.ciiva.com/15223/getdatasheetpartid-103913-15223276.pdf, ComponentLink5URL=https://datasheet.ciiva.com/15223/getdatasheetpartid-103913-15223276.pdf, ComponentLink6Description=https://datasheet.ciiva.com/11773/0900766b80dc02b1-11773629.pdf, ComponentLink6URL=https://datasheet.ciiva.com/11773/0900766b80dc02b1-11773629.pdf, ComponentLink7Description=https://datasheet.ciiva.com/16215/ltst-c191kgkt-16215151.pdf, ComponentLink7URL=https://datasheet.ciiva.com/16215/ltst-c191kgkt-16215151.pdf, Depth=0.8mm, Dominant Wavelength=571nm, Height=0.55mm, Illumination Colour=Green, Lead Free="Lead Free", Length=1.6mm, Lens Style=Clear,Diffused,Colorless,Rectangular, Lens Transparency=Clear, Luminous Intensity=35mcd, Manufacturer Part Number=LTST-C191KGKT, Mount="Surface Mount", Number of Elements=1, Number of LEDs=1, Number of Pins=2, Packaging="Tape and Reel", Power Rating=75mW, Pricing 1="1=0.29, 10=0.211, 25=0.1556, 100=0.1111, 250=0.0756, 500=0.0667, 1000=0.0522, 2500=0.0511 (USD)", Radiation Hardening=No, Stock 1=1301664, Supplier 1=Digi-Key, Viewing Angle=130°, Wavelength=574nm, Width=0.8mm
D2 D5 D6 D8 D9 D10 D11: "DIODE SCHOTTKY 100V 1A SMA", Average Rectified Current=1A, Capacitance=30pF, Case/Package=SMA, Forward Voltage=850mV, Manufacturer=MCC, Max Forward Surge Current (Ifsm)=30A, Max Operating Temperature=125°C, Max Repetitive Reverse Voltage (Vrrm)=100V, Max Reverse Leakage Current=500uA, Min Operating Temperature=-55°C, Package Quantity=1, Peak Reverse Current=20mA, Supplier Part Number 1=SS110-TPCT-ND, ComponentLink1Description=https://datasheet.ciiva.com/7963/1684859-7963319.pdf, ComponentLink1URL=https://datasheet.ciiva.com/7963/1684859-7963319.pdf, ComponentLink2Description=https://datasheet.ciiva.com/16742/ss12-ss110hsma-16742536.pdf, ComponentLink2URL=https://datasheet.ciiva.com/16742/ss12-ss110hsma-16742536.pdf, ComponentLink3Description=https://datasheet.ciiva.com/912/ss12-ss110hsma-912300.pdf, ComponentLink3URL=https://datasheet.ciiva.com/912/ss12-ss110hsma-912300.pdf, ComponentLink4Description=https://datasheet.ciiva.com/912/ss12-ss110hsma-912301.pdf, ComponentLink4URL=https://datasheet.ciiva.com/912/ss12-ss110hsma-912301.pdf, ComponentLink5Description=https://datasheet.ciiva.com/28382/1684859-28382109.pdf, ComponentLink5URL=https://datasheet.ciiva.com/28382/1684859-28382109.pdf, ComponentLink6Description=https://datasheet.ciiva.com/912/ss12-ss110hsma-912302.pdf, ComponentLink6URL=https://datasheet.ciiva.com/912/ss12-ss110hsma-912302.pdf, Current Rating=1A, Element Configuration=Single, Forward Current=1A, Height=2.44mm, Lead Free="Lead Free", Length=4.57mm, Manufacturer Part Number=SS110-TP, Max Reverse Voltage (DC)=100V, Max Surge Current=30A, Mount="Surface Mount", Number of Pins=2, Output Current=1A, Packaging="Tape and Reel", Peak Non-Repetitive Surge Current=30A, Polarity=Standard, Pricing 1="1=0.41, 10=0.292, 100=0.172, 500=0.0973, 1000=0.0746 (USD)", Radiation Hardening=No, REACH SVHC=Unknown, Stock 1=56746, Supplier 1=Digi-Key, Voltage Rating (DC)=100V, Width=2.84mm
D4: "LED TRICOLOR RED GREEN BLUE", Manufacturer=Everlight, Supplier Part Number 1=1080-1552-2-ND, Manufacturer Part Number=EAST1616RGBB4, Stock 1=0, Supplier 1=Digi-Key
D7: library part LTST-C191KRKT, "LED RED CLEAR 0603 SMD", Case/Package=0603, Case Code (Metric)=1608, Forward Current=30mA, Forward Voltage=2V, Lens Colour=Colorless, Manufacturer="Vishay Lite-On", Max Operating Temperature=85°C, Min Operating Temperature=-55°C, Package Quantity=1, Power Dissipation=75mW, Reverse Voltage=5V, Supplier Part Number 1=160-1447-1-ND, Test Current=20mA, Case Code (Imperial)=0603, Colour=Red, ComponentLink1Description=https://datasheet.ciiva.com/11773/0900766b80dc02b2-11773601.pdf, ComponentLink1URL=https://datasheet.ciiva.com/11773/0900766b80dc02b2-11773601.pdf, ComponentLink2Description=https://datasheet.ciiva.com/2109/s-110-ltst-c191krkt-2109970.pdf, ComponentLink2URL=https://datasheet.ciiva.com/2109/s-110-ltst-c191krkt-2109970.pdf, ComponentLink3Description=https://datasheet.ciiva.com/2109/s-110-ltst-c191krkt-2109971.pdf, ComponentLink3URL=https://datasheet.ciiva.com/2109/s-110-ltst-c191krkt-2109971.pdf, ComponentLink4Description=https://datasheet.ciiva.com/16212/ltst-c191krkt-16212419.pdf, ComponentLink4URL=https://datasheet.ciiva.com/16212/ltst-c191krkt-16212419.pdf, ComponentLink5Description=https://datasheet.ciiva.com/2109/s-110-ltst-c191krkt-2109972.pdf, ComponentLink5URL=https://datasheet.ciiva.com/2109/s-110-ltst-c191krkt-2109972.pdf, ComponentLink6Description=https://datasheet.ciiva.com/15117/getdatasheetpartid-141922-15117737.pdf, ComponentLink6URL=https://datasheet.ciiva.com/15117/getdatasheetpartid-141922-15117737.pdf, ComponentLink7Description=https://datasheet.ciiva.com/12400/lite-on-ltst-c191krkt-190135-12400910.pdf, ComponentLink7URL=https://datasheet.ciiva.com/12400/lite-on-ltst-c191krkt-190135-12400910.pdf, Depth=0.8mm, Dominant Wavelength=631nm, Height=0.55mm, Illumination Colour=Red, Lead Free="Lead Free", Length=1.6mm, Lens Style=Clear,Diffused,Colorless,Rectangular, Lens Transparency=Clear, Luminous Intensity=54mcd, Manufacturer Part Number=LTST-C191KRKT, Mount="Surface Mount", Number of Elements=1, Number of LEDs=1, Number of Pins=2, Packaging="Tape and Reel", Power Rating=75mW, Pricing 1="1=0.29, 10=0.211, 25=0.1556, 100=0.1111, 250=0.0756, 500=0.0667, 1000=0.0522, 2500=0.0511 (USD)", Radiation Hardening=No, Stock 1=684119, Supplier 1=Digi-Key, Viewing Angle=130°, Voltage=2V, Wavelength=639nm, Width=0.8mm
D12: library part SMAZ10-13-F, "DIODE ZENER 10V 5% 1W 2-Pin SMA T/R", Case/Package=SMA, Forward Voltage=1.2V, Manufacturer=Diodes, Max Operating Temperature=150°C, Max Power Dissipation=1W, Max Reverse Leakage Current=1uA, Min Operating Temperature=-65°C, Package Quantity=5000, Supplier Part Number 1=SMAZ10-FDICT-ND, Test Current=50mA, Tolerance=5%, ComponentLink1Description=http://www.diodes.com//datasheets/ds18015.pdf, ComponentLink1URL=http://www.diodes.com//datasheets/ds18015.pdf, Element Configuration=Single, Height=2.09mm, Impedance=4R, Lead Free="Lead Free", Length=4.6mm, Manufacturer Part Number=SMAZ10-13-F, Mount="Surface Mount", Number of Pins=2, Packaging="Tape and Reel", Peak Reverse Current=1uA, Power Dissipation=1W, Power Rating=1W, Pricing 1="1=0.53, 10=0.397, 100=0.2476, 500=0.1694, 1000=0.1303 (USD)", Radiation Hardening=No, Stock 1=86916, Supplier 1=Digi-Key, Voltage Rating (DC)=10V, Voltage Tolerance=5%, Weight=0.002258oz, Width=2.92mm, Working Voltage=10V, Zener Current=1uA, Zener Voltage=10V
D13: library part 1PGSMC5369HR7G, "DIODE ZENER 51V 5W", Manufacturer="Taiwan Semiconductor", Supplier Part Number 1=1PGSMC5369HR7GCT-ND, Manufacturer Part Number=1PGSMC5369HR7G, Pricing 1="1=0.87, 10=0.765, 25=0.6772, 100=0.5899, 250=0.5134 (USD)", Stock 1=1700, Supplier 1=Digikey
FB1 FB2: library part FBMJ4516HL230NTV, "FERRITE BEAD Ind Chip Bead Multi-Layer 23Ohm 30% 100MHz Ferrite 3.5A 1806 T/R", Case/Package=1806, Case Code (Metric)=4516, DC Resistance (DCR)=14mR, Manufacturer="Taiyo Yuden", Max Current Rating=3.5A, Max Operating Temperature=125°C, Min Operating Temperature=-40°C, Package Quantity=2000, Resistance=180623R, Supplier Part Number 1=587-3857-1-ND, Test Frequency=100MHz, Tolerance=30%, Case Code (Imperial)=1806, ComponentLink1Description=http://www.mouser.com/ds/2/396/chipbeads01_e-559265.pdf, ComponentLink1URL=http://www.mouser.com/ds/2/396/chipbeads01_e-559265.pdf, ComponentLink2Description=http://ds.yuden.co.jp/TYCOMPAS/ut/detail.do?productNo=FBMJ4516HL230NTV&fileName=FBMJ4516HL230NTV_SS&mode=specSheetDownload, ComponentLink2URL=http://ds.yuden.co.jp/TYCOMPAS/ut/detail.do?productNo=FBMJ4516HL230NTV&fileName=FBMJ4516HL230NTV_SS&mode=specSheetDownload, ComponentLink3Description=https://www.yuden.co.jp/ut/product/category/emisuppression/FBMJ4516HL230NTV_SS.pdf, ComponentLink3URL=https://www.yuden.co.jp/ut/product/category/emisuppression/FBMJ4516HL230NTV_SS.pdf, Core Material=Ferrite, Depth=1.6mm, Height=1.1mm, Impedance=23R, Length=0.177inch, Manufacturer Part Number=FBMJ4516HL230NTV, Max DC Current=3.5A, Mount="Surface Mount", Number of Lines=1, Packaging="Tape and Reel", Pricing 1="1=0.26, 10=0.202, 25=0.1676, 50=0.1444, 100=0.1299, 250=0.1097, 500=0.0982, 1000=0.0837 (USD)", Stock 1=1819, Supplier 1=Digi-Key, Termination=SMD/SMT, Width=1.6mm
J1 J3: "CONN JST PH 6 Positions Header, Shrouded Connector 0.079\" (2.00mm) Through Hole Tin", Colour=Natural, Contact Resistance=20mR, Current Rating=2A, Housing Colour=White, Insulation Resistance=1MR, Manufacturer=JST, Max Operating Temperature=85°C, Max Voltage Rating (AC)=100V, Min Operating Temperature=-25°C, Supplier Part Number 1=455-1708-ND, ComponentLink1Description=https://datasheet.ciiva.com/712/eph-712563.pdf, ComponentLink1URL=https://datasheet.ciiva.com/712/eph-712563.pdf, ComponentLink2Description=https://datasheet.ciiva.com/26894/getdatasheetpartid-639917-26894487.pdf, ComponentLink2URL=https://datasheet.ciiva.com/26894/getdatasheetpartid-639917-26894487.pdf, ComponentLink3Description=https://datasheet.ciiva.com/11747/0900766b8082f554-11747368.pdf, ComponentLink3URL=https://datasheet.ciiva.com/11747/0900766b8082f554-11747368.pdf, ComponentLink4Description=https://datasheet.ciiva.com/20207/523648-20207241.pdf, ComponentLink4URL=https://datasheet.ciiva.com/20207/523648-20207241.pdf, ComponentLink5Description=https://datasheet.ciiva.com/8052/80560-8052027.pdf, ComponentLink5URL=https://datasheet.ciiva.com/8052/80560-8052027.pdf, Connector Type="Male Pin", Contact Material=Brass,Tin, Contact Mating Length=0.13inch, Contact Plating=Copper,Tin, Depth=4.5mm, Fastening Type=Detent, Gender=Male, Height=9.4mm, Housing Material=Polyamide, Lead Free="Lead Free", Lead Pitch=2mm, Length=13.9mm, Manufacturer Part Number=B6B-PH-K-S(LF)(SN), Max Current Rating=2A, Mount="Through Hole", Number of Contacts=6, Number of Pins=6, Number of Poles=6, Number of Positions=6, Number of Rows=1, Orientation=Straight, Packaging=Bulk, Pitch=2mm, Pricing 1="1=0.33, 10=0.313, 100=0.2194, 500=0.1881, 1000=0.1567, 5000=0.1344, 10000=0.1254 (USD)", REACH SVHC="No SVHC", Stock 1=75035, Supplier 1=Digi-Key, Termination=Solder, Voltage Rating=100V, Voltage Rating (AC)=100V, Width=4.5mm, Working Voltage=100V
J2: library part 61300311121, "CONN_HeaderPins3pos WURTH ELEKTRONIK Board-To-Board Connector, Vertical, WR-PHD Series, Through Hole, Header, 3 Contacts, 2.54 mm", Case/Package=100, Colour=Black, Manufacturer="Wurth Electronics", ComponentLink1Description=http://www.farnell.com/cad/1737268.pdf, ComponentLink1URL=http://www.farnell.com/cad/1737268.pdf, Connector Type="Male Pin", Contact Material=Copper, Contact Mating Length=0.236inch, Contact Plating=Gold, Gender=Male, Lead Free="Lead Free", Manufacturer Part Number=61300311121, Mount="Through Hole", Number of Contacts=3, Number of Positions=3, Number of Rows=1, Packaging=Bulk, Pitch=0.1inch, Pricing 1="1=0.13, 10=0.106, 25=0.088, 50=0.074, 100=0.067, 1000=0.061 (USD)", REACH SVHC=Unknown, Stock 1=57026, Supplier 1=Digi-Key, Supplier Part Number 1=732-5316-ND, Termination=Solder
JP1: library part M20-9990246, "CONN_HeaderPins2pos Headers & Wire Housings 02 SIL VERTICAL PIN HEADER TIN", Case/Package=SIL, Colour=Black, Contact Resistance=30mR, Current Rating=3A, Insulation Resistance=10GR, Manufacturer=Harwin, Max Operating Temperature=105°C, Min Operating Temperature=-40°C, Package Quantity=1000, Voltage Rating (AC)=750V, ComponentLink1Description=https://datasheet.ciiva.com/8046/315376-8046930.pdf, ComponentLink1URL=https://datasheet.ciiva.com/8046/315376-8046930.pdf, ComponentLink2Description=https://datasheet.ciiva.com/6833/m20-999-6833368.pdf, ComponentLink2URL=https://datasheet.ciiva.com/6833/m20-999-6833368.pdf, ComponentLink3Description=https://datasheet.ciiva.com/11745/0900766b81034e61-11745755.pdf, ComponentLink3URL=https://datasheet.ciiva.com/11745/0900766b81034e61-11745755.pdf, ComponentLink4Description=https://datasheet.ciiva.com/22660/1830818-22660571.pdf, ComponentLink4URL=https://datasheet.ciiva.com/22660/1830818-22660571.pdf, ComponentLink5Description=https://datasheet.ciiva.com/26852/getdatasheetpartid-384170-26852203.pdf, ComponentLink5URL=https://datasheet.ciiva.com/26852/getdatasheetpartid-384170-26852203.pdf, Connector Type="Male Pin", Contact Material=Bronze,Brass, Contact Mating Length=0.24inch, Contact Plating=Tin, Depth=2.54mm, Gender=Male, Housing Colour=Black, Housing Material=Nylon, Length=5.08mm, Manufacturer Part Number=M20-9990246, Max Current Rating=3A, Number of Contacts=2, Number of Positions=2, Number of Rows=1, Orientation=Straight, Packaging=Bulk, Pitch=2.54mm, Pricing 1="1=0.11, 10=0.099, 100=0.0609, 500=0.0504, 1000=0.0441, 5000=0.0378, 10000=0.0368 (USD)", Radiation Hardening=No, REACH SVHC="No SVHC", Stock 1=53577, Supplier 1=Digi-Key, Supplier Part Number 1=952-2262-ND, Termination=Solder
L1: library part 74404043220A, "INDUCTOR SHIELDED", Manufacturer="Wurth Electronics", Supplier Part Number 1=732-10762-1-ND, Manufacturer Part Number=74404043220A, Pricing 1="1=0.6, 50=0.4958, 100=0.3769, 1000=0.3273 (USD)", Stock 1=12022, Supplier 1=Digi-Key
Q1 Q2 Q3 Q4 Q5 Q6: "MOSFET N-CH 60V 60A 4.5mOhm Rds(ON)", Manufacturer="Vishay Siliconix", Supplier Part Number 1=SIR186DP-T1-RE3CT-ND, Manufacturer Part Number=SIR186DP-T1-RE3, Pricing 1="1=1.45, 10=1.28, 100=1.0118, 500=0.7847, 1000=0.6195 (USD)", Stock 1=4321, Supplier 1=Digi-Key
Q7: "MOSFET P-CH PWR56 40V 8 MOHM", Manufacturer="ON Semiconductor", Supplier Part Number 1=FDWS9509L-F085OSCT-ND, Manufacturer Part Number=FDWS9509L-F085, Pricing 1="1=1.76, 10=1.562, 100=1.2344, 500=0.9573, 1000=0.7558 (USD)", Stock 1=2417, Supplier 1=Digi-Key
R1 R2 R3 R4 R6 R9 R13 R14 R16: library part RC0402JR-0710KL, "RES SMD 10K OHM 5% 1/16W 0402", Case/Package=0402, Case Code (Metric)=1005, Manufacturer=Yageo, Max Operating Temperature=155°C, Max Power Dissipation=63mW, Min Operating Temperature=-55°C, Package Quantity=1, Power Rating=62.5mW, Resistance=10kR, Supplier Part Number 1=311-10KJRCT-ND, Temperature Coefficient=100ppm/°C, Tolerance=5%, Voltage Rating=50V, Case Code (Imperial)=0402, Composition="Thick Film", Depth=0.5mm, Features="Moisture Resistant", Height=0.016inch, Lead Free="Lead Free", Length=1mm, Manufacturer Part Number=RC0402JR-0710KL, Military Standard=Not, Number of Terminations=2, Packaging="Tape and Reel", Pricing 1="1=0.1, 10=0.018, 100=0.0073, 1000=0.0033, 2500=0.0029, 5000=0.0024 (USD)", REACH SVHC=Unknown, Stock 1=47303622, Supplier 1=Digi-Key, Termination=SMD/SMT, Width=0.02inch
R5 R15: library part RC0402JR-070RL, "RES SMD 0 OHM 1/16W 0402", Case/Package=0402, Case Code (Metric)=1005, Manufacturer=Yageo, Max Operating Temperature=155°C, Max Power Dissipation=63mW, Min Operating Temperature=-55°C, Package Quantity=1, Power Rating=62.5mW, Resistance=0mR, Supplier Part Number 1=311-0.0JRCT-ND, Temperature Coefficient=200ppm/°C, Tolerance=5%, Voltage Rating=50V, Case Code (Imperial)=0402, Composition="Thick Film", Contact Plating=Matte,Tin, Depth=0.5mm, Features="Moisture Resistant", Height=0.016inch, Lead Free="Lead Free", Length=1mm, Manufacturer Part Number=RC0402JR-070RL, Military Standard=Not, Number of Terminations=2, Packaging="Tape and Reel", Pricing 1="1=0.1, 10=0.017, 25=0.0124, 50=0.0096, 100=0.007, 250=0.0054, 500=0.0043, 1000=0.0032, 5000=0.0023 (USD)", Radiation Hardening=No, REACH SVHC=Unknown, Stock 1=44333412, Supplier 1=Digi-Key, Termination=SMD/SMT, Width=0.02inch
R7 R32: library part ERJ-2RKF54R9X, "RES SMD 54.9K OHM 1/10W 0402 54.9 Ohm 1% 0.1W(1/10W) ±100ppm/C Molded SMD Automotive Punched T/R", Case/Package=0402, Case Code (Metric)=1005, Manufacturer=Panasonic, Max Operating Temperature=155°C, Max Power Dissipation=100mW, Min Operating Temperature=-55°C, Package Quantity=1, Resistance=54.9R, Supplier Part Number 1=P54.9LCT-ND, Temperature Coefficient=100ppm/°C, Tolerance=1%, Voltage Rating=50V, Case Code (Imperial)=0402, Composition="Thick Film", Contact Plating=Tin, Depth=0.5mm, Features="Automotive AEC-Q200", Height=0.016inch, Lead Free="Lead Free", Length=1mm, Manufacturer Part Number=ERJ-2RKF54R9X, Military Standard=Not, Mount="Surface Mount", Number of Terminations=2, Packaging="Tape and Reel", Power Rating=100mW, Pricing 1="1=0.1, 10=0.056, 100=0.0227, 1000=0.0102, 2500=0.0089, 5000=0.0073 (USD)", REACH SVHC="No SVHC", Stock 1=343302, Supplier 1=Digi-Key, Termination=SMD/SMT, Voltage Rating (DC)=50V, Width=0.02inch
R8 R10 R11 R12 R17: library part RC0402JR-07100RL, "RES SMD 100 OHM 5% 1/16W 0402", Case/Package=0402, Case Code (Metric)=1005, Manufacturer=Yageo, Max Operating Temperature=155°C, Max Power Dissipation=63mW, Min Operating Temperature=-55°C, Package Quantity=1, Supplier Part Number 1=311-100JRCT-ND, Temperature Coefficient=100ppm/°C, Tolerance=5%, Voltage Rating=50V, Case Code (Imperial)=0402, Composition="Thick Film", Depth=0.5mm, Features="Moisture Resistant", Height=0.016inch, Lead Free="Lead Free", Length=1mm, Manufacturer Part Number=RC0402JR-07100RL, Military Standard=Not, Number of Terminations=2, Packaging="Tape and Reel", Power Rating=63mW, Pricing 1="1=0.1, 10=0.015, 100=0.006, 1000=0.0027, 2500=0.0023, 5000=0.0019 (USD)", REACH SVHC="No SVHC", Resistance=100R, Stock 1=447099, Supplier 1=Digi-Key, Termination=SMD/SMT, Weight=2.3E-05oz, Width=0.02inch
R18 R19 R20: library part WSLF25122L000FEA, "RES SMD 0.002 OHM 1% 5W 2512", Case/Package=2512, Case Code (Metric)=6432, Manufacturer="Vishay Dale", Max Operating Temperature=170°C, Max Power Dissipation=5W, Min Operating Temperature=-65°C, Resistance=2mR, Supplier Part Number 1=541-3126-1-ND, Temperature Coefficient=70ppm/°C, Tolerance=1%, Case Code (Imperial)=2512, Composition="Metal Element", Height=0.024inch, Lead Free="Lead Free", Length=0.25inch, Manufacturer Part Number=WSLF25122L000FEA, Number of Terminations=2, Packaging="Tape and Reel", Pricing 1="1=0.78, 10=0.647, 25=0.5544, 50=0.499, 100=0.4343, 250=0.3881, 500=0.3142, 1000=0.2541 (USD)", Stock 1=12139, Supplier 1=Digi-Key, Width=0.125inch
R21 R22 R23 R27: library part RC0402FR-0734K8L, "RES SMD 34.8K OHM 1% 1/16W 0402", Case/Package=0402, Case Code (Metric)=1005, Manufacturer=Yageo, Max Operating Temperature=155°C, Max Power Dissipation=63mW, Min Operating Temperature=-55°C, Power Rating=62.5mW, Resistance=34.8kR, Supplier Part Number 1=YAG3125CT-ND, Temperature Coefficient=100ppm/°C, Tolerance=1%, Voltage Rating=50V, Case Code (Imperial)=0402, Composition="Thick Film", Contact Plating=Matte,Tin, Depth=0.5mm, Features="Moisture Resistant", Height=0.016inch, Lead Free="Lead Free", Length=1mm, Manufacturer Part Number=RC0402FR-0734K8L, Military Standard=Not, Number of Terminations=2, Packaging="Tape and Reel", Pricing 1="1=0.1, 10=0.018, 100=0.0073, 1000=0.0033, 2500=0.0029, 5000=0.0024 (USD)", Stock 1=29900, Supplier 1=Digi-Key, Termination=SMD/SMT, Voltage Rating (DC)=50V, Width=0.02inch
R24 R25 R26 R28: library part CRCW04024R99FKEDC, "RES SMD 4.99K OHM 1/16W 0402", Manufacturer=Vishay, Supplier Part Number 1=541-4085-1-ND, Manufacturer Part Number=CRCW04024R99FKEDC, Pricing 1="1=0.1, 10=0.093, 100=0.0358, 1000=0.0157, 2500=0.0136, 5000=0.0122 (USD)", Stock 1=7980, Supplier 1=Digi-Key
R29 R30 R31: library part RC0402JR-072K2L, "RES SMD 2.2K OHM 5% 1/16W 0402", Case/Package=0402, Case Code (Metric)=1005, Manufacturer=Yageo, Max Operating Temperature=155°C, Max Power Dissipation=63mW, Min Operating Temperature=-55°C, Package Quantity=1, Resistance=2.2kR, Supplier Part Number 1=311-2.2KJRCT-ND, Temperature Coefficient=100ppm/°C, Tolerance=5%, Voltage Rating=50V, Case Code (Imperial)=0402, Composition="Thick Film", Depth=0.5mm, Features="Moisture Resistant", Height=0.016inch, Lead Free="Lead Free", Length=1mm, Manufacturer Part Number=RC0402JR-072K2L, Military Standard=Not, Number of Terminations=2, Packaging="Tape and Reel", Power Rating=63mW, Pricing 1="1=0.1, 10=0.018, 100=0.0073, 1000=0.0033, 2500=0.0029, 5000=0.0024 (USD)", REACH SVHC=Unknown, Stock 1=7890813, Supplier 1=Digi-Key, Termination=SMD/SMT, Weight=2.3E-05oz, Width=0.02inch, Working Voltage=50V
U1: "IC USB SERIAL BASIC UART 16QFN", Case/Package=QFN, Manufacturer=FTDI, Max Operating Temperature=85°C, Max Supply Voltage=5.5V, Min Operating Temperature=-40°C, Min Supply Voltage=2.97V, Operating Supply Current=8mA, Operating Supply Voltage=5V, Package Quantity=5000, Supplier Part Number 1=768-1130-1-ND, ComponentLink1Description=https://datasheet.ciiva.com/16213/ds-ft230x-16213755.pdf, ComponentLink1URL=https://datasheet.ciiva.com/16213/ds-ft230x-16213755.pdf, ComponentLink2Description=https://datasheet.ciiva.com/48909/70403914-48909084.pdf, ComponentLink2URL=https://datasheet.ciiva.com/48909/70403914-48909084.pdf, ComponentLink3Description=https://datasheet.ciiva.com/1787/ft-x-series-1787309.pdf, ComponentLink3URL=https://datasheet.ciiva.com/1787/ft-x-series-1787309.pdf, ComponentLink4Description=https://datasheet.ciiva.com/1787/ft-x-series-1787310.pdf, ComponentLink4URL=https://datasheet.ciiva.com/1787/ft-x-series-1787310.pdf, ComponentLink5Description=https://datasheet.ciiva.com/1787/ft-x-series-1787311.pdf, ComponentLink5URL=https://datasheet.ciiva.com/1787/ft-x-series-1787311.pdf, ComponentLink6Description=https://datasheet.ciiva.com/30478/0900766b811020cb-30478159.pdf, ComponentLink6URL=https://datasheet.ciiva.com/30478/0900766b811020cb-30478159.pdf, Data Rate=12Mbps, Height=0.75mm, Interface=USB,UART, Lead Free="Lead Free", Length=4mm, Manufacturer Part Number=FT230XQ-R, Mount="Surface Mount", Number of Channels=1, Number of Pins=16, Packaging="Tape and Reel", Pricing 1="1=2.04, 25=1.97, 100=1.9, 250=1.71, 500=1.54, 1000=1.4806 (USD)", Stock 1=185744, Supplier 1=Digi-Key, Weight=0.002014oz, Width=4mm
U2: "IC BUCK 3V3 REGULATOR 0.6A Conv DC-DC 1-OUT Step Down 4V 60V 6-Pin SOT T/R", Case/Package=SOT-23-6, Manufacturer="Texas Instruments", Max Input Voltage=60V, Max Operating Temperature=125°C, Max Output Current=600mA, Max Output Voltage=55V, Min Input Voltage=4V, Min Operating Temperature=-40°C, Min Output Voltage=765mV, Quiescent Current=28uA, Supplier Part Number 1=296-40293-1-ND, Switching Frequency=700kHz, Contact Plating=Nickel,Gold, Lead Free="Lead Free", Manufacturer Part Number=LMR16006XDDCR, Mount="Surface Mount", Number of Outputs=1, Number of Pins=6, Operating Supply Voltage=60V, Output Current=600mA, Output Voltage=55V, Packaging="Tape and Reel", Pricing 1="1=2.88, 10=2.589, 100=2.121, 500=1.8055, 1000=1.5228 (USD)", REACH SVHC="No SVHC", Stock 1=5, Supplier 1=Digi-Key, Synchronous Rectifier=No